# Altium PCB Card-Shuffler.PcbDoc
Units mil, origin at the board's own origin, x right, y up, seen from the top; angles counter-clockwise.
Board outline 4500 x 3050 mil, 4 copper layers (Top Layer, Power plane, Ground Plane, Bottom Layer), stack 23.756 mil thick; 55 components, 40 nets, 244 pads, 69 vias.
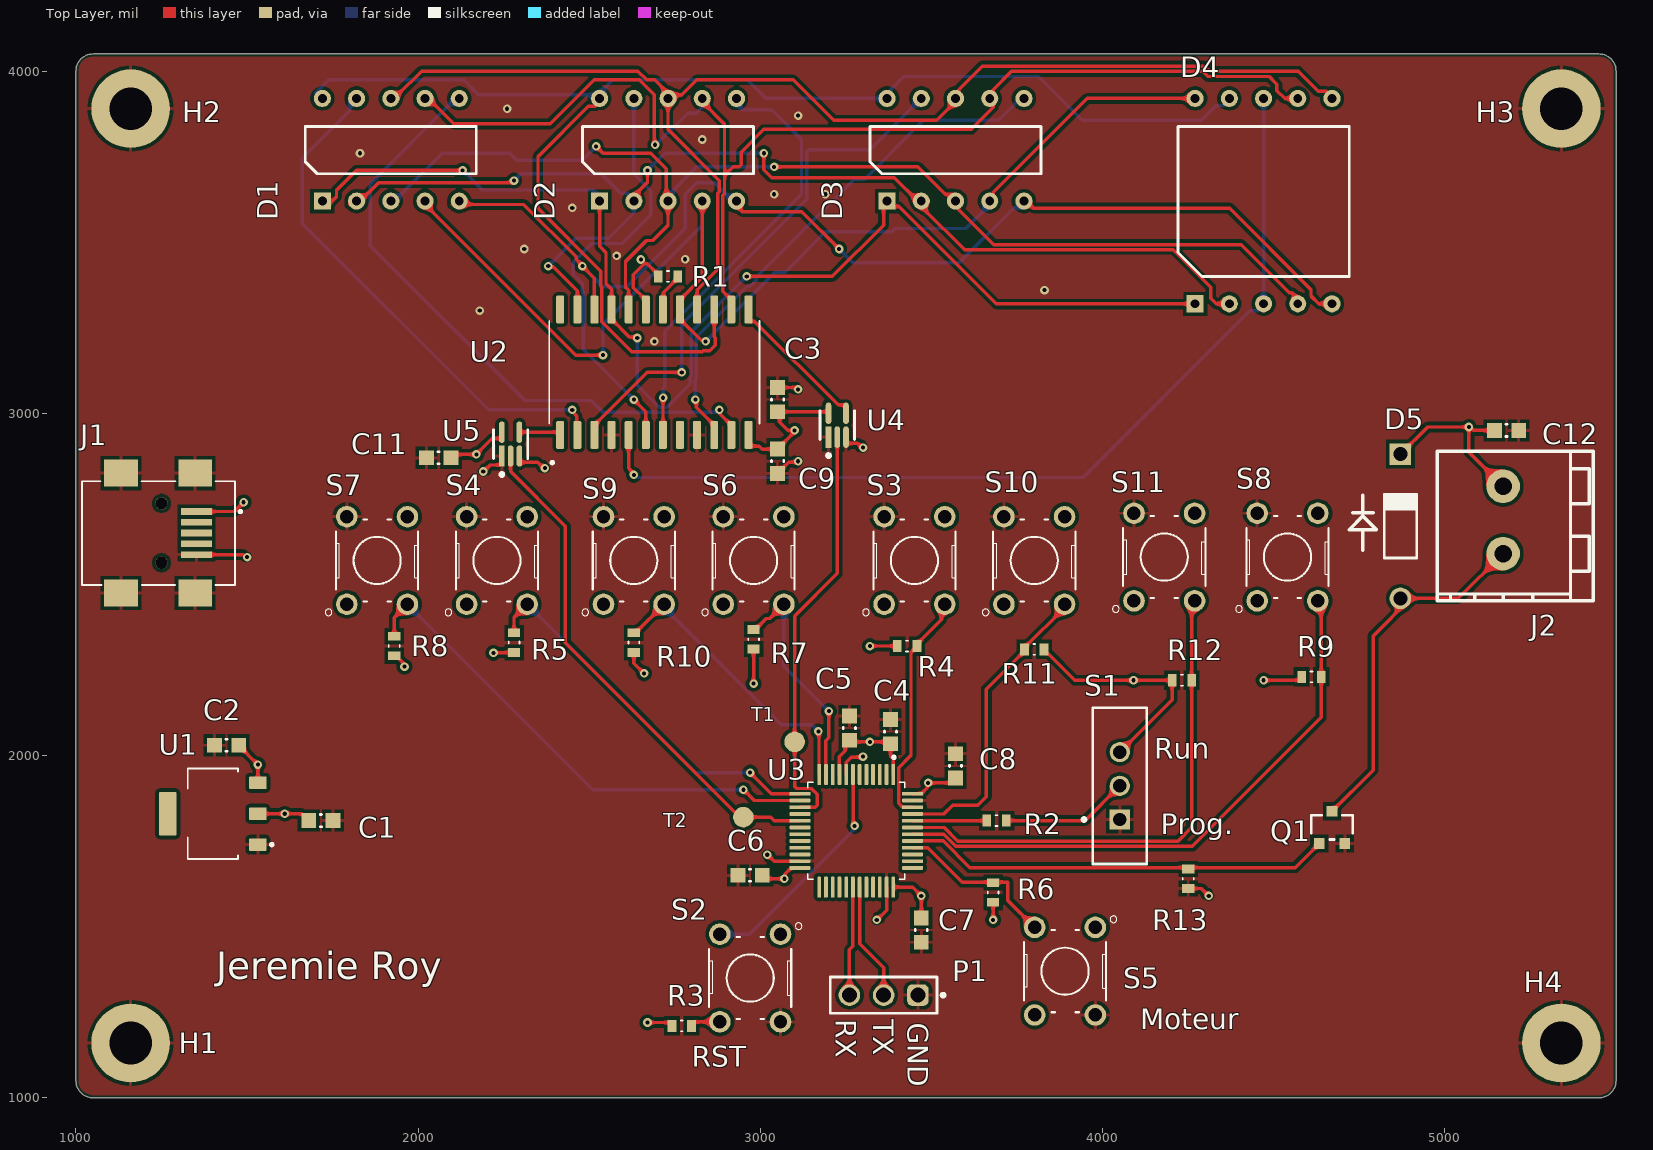
[diagram p0: Top Layer view]
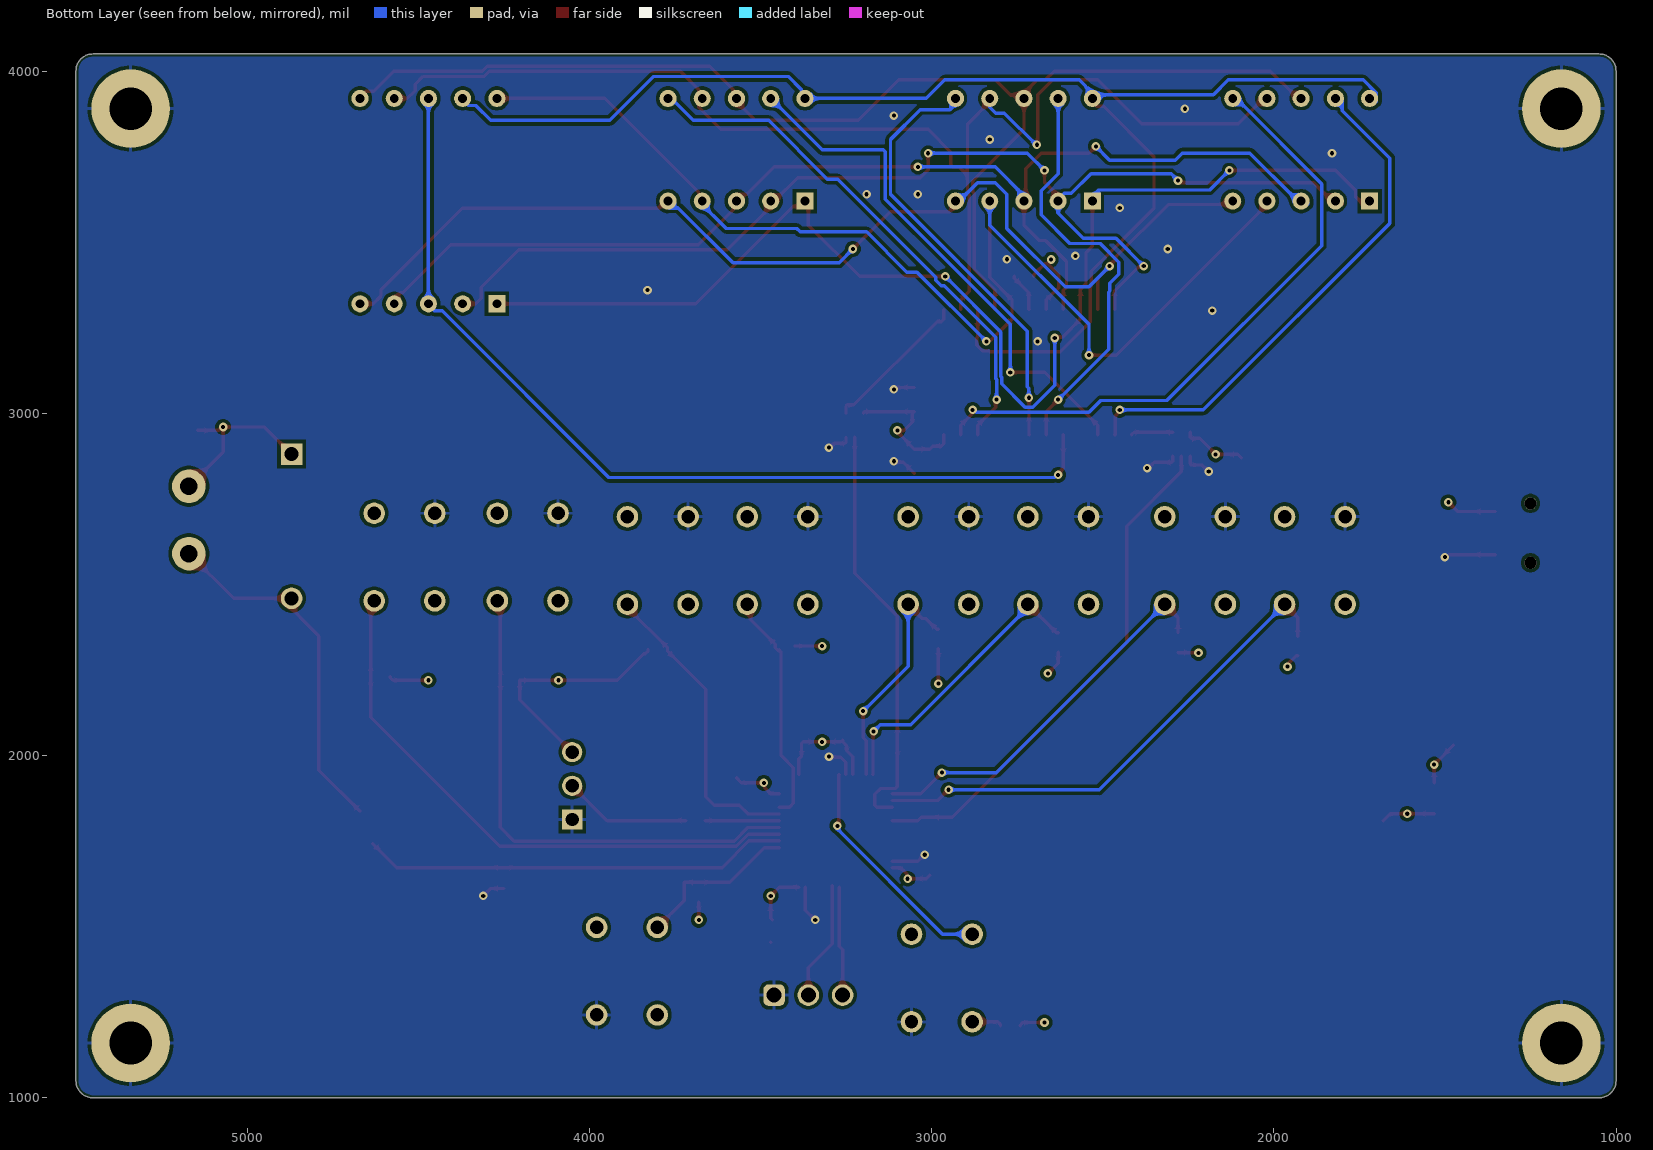
[diagram p1: Bottom Layer view, seen from below]
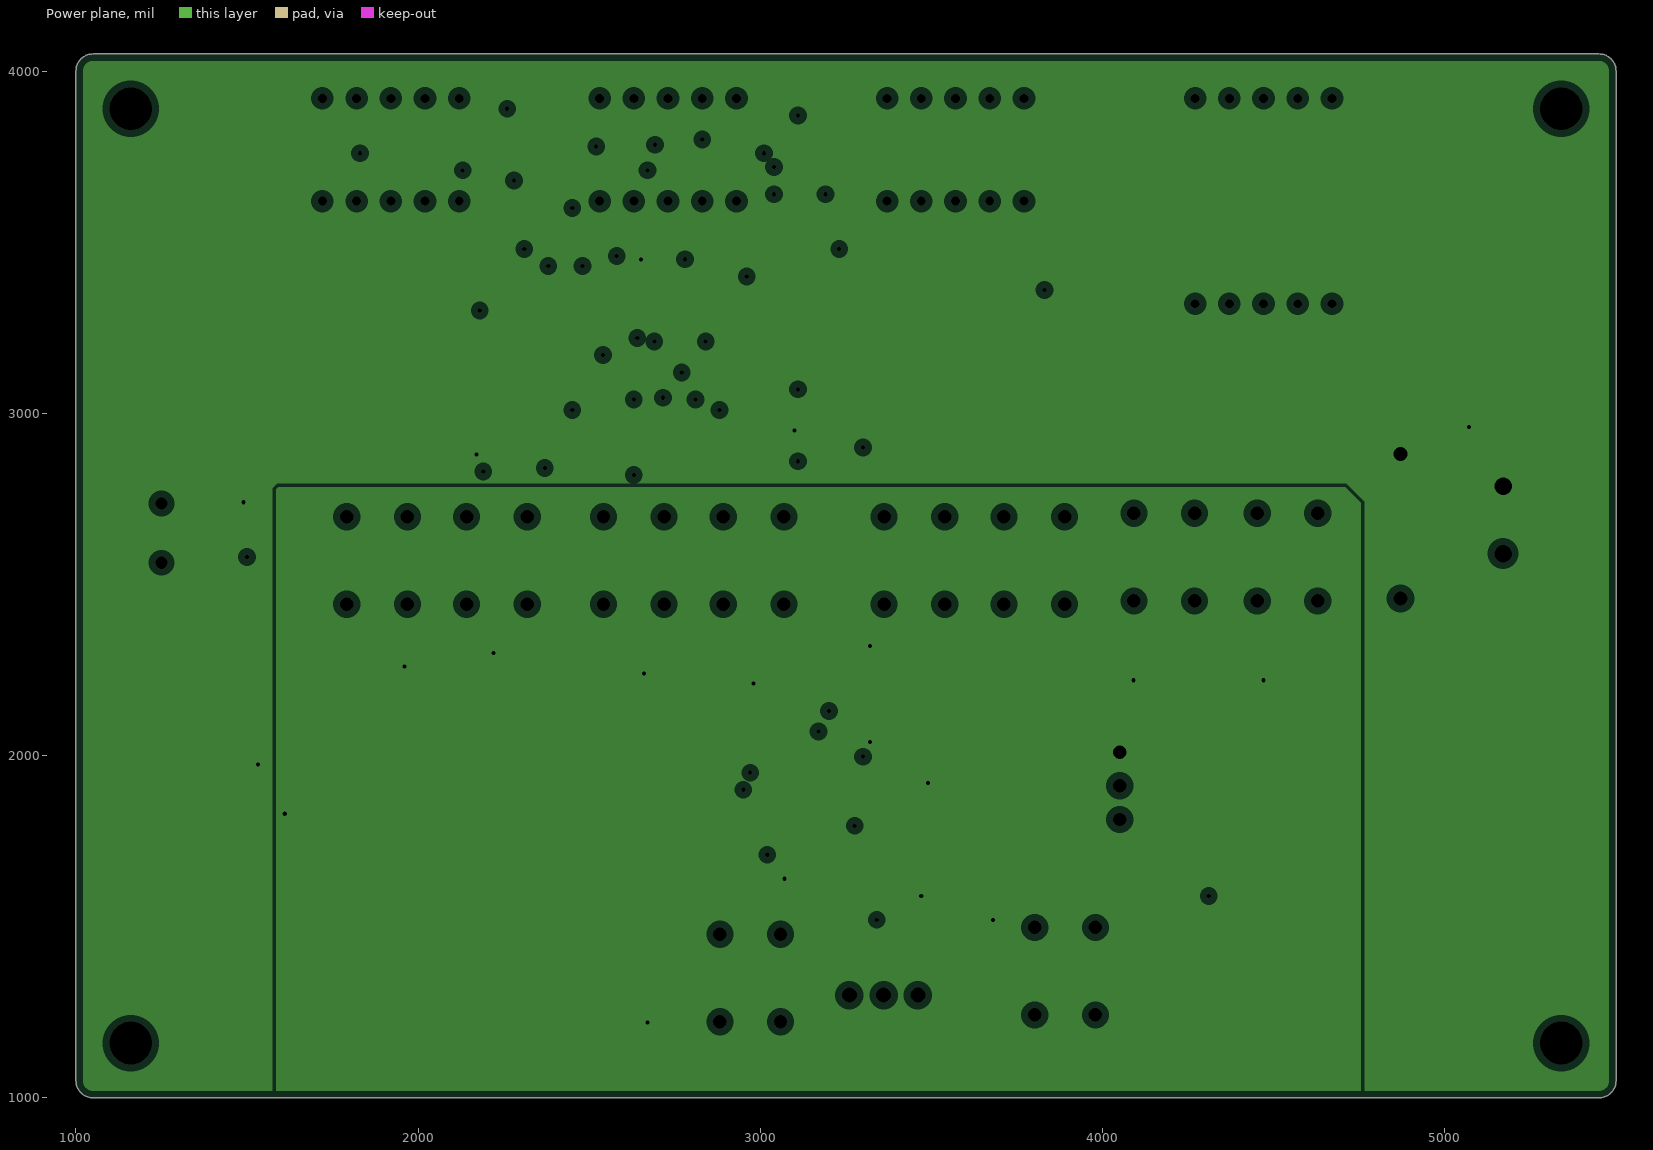
[diagram p2: Power plane, clearances drawn from the general rule]
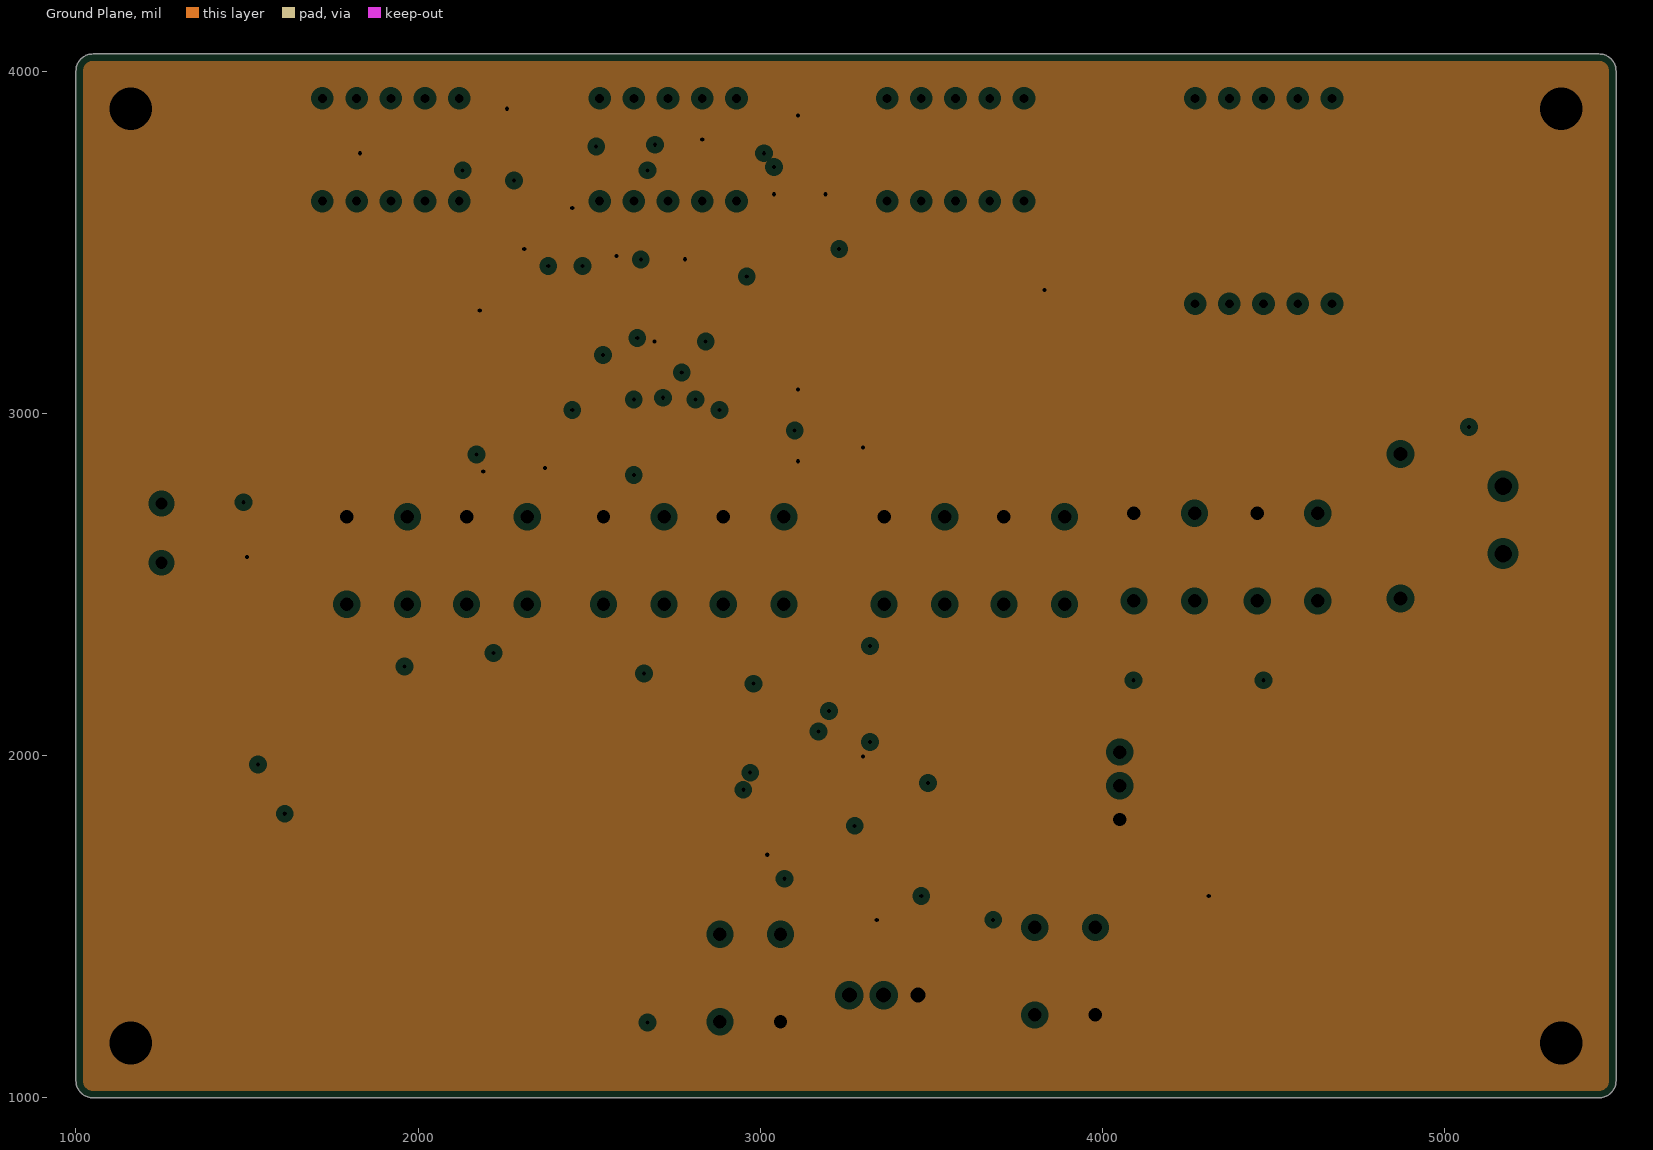
[diagram p3: Ground Plane, clearances drawn from the general rule]

## Layer stack, top to bottom
Top Solder: solder mask 0.4, Solder Resist, Dk 3.5
Top Layer: signal copper 1.4
Dielectric 2: prepreg 2.8, PP-006, Dk 4.1
Power plane: plane copper 1.378, net (Multiple Nets)
Dielectric 1: dielectric 12.6, FR-4, Dk 4.8
Ground Plane: plane copper 1.378, net GND
Dielectric 3: prepreg 2.8, PP-006, Dk 4.1
Bottom Layer: signal copper 1.4
Bottom Solder: solder mask 0.4, Solder Resist, Dk 3.5

## Board outline
1050,1000 cw(c1050,1050) 1000,1050 1000,4000 cw(c1050,4000) 1050,4050 5450,4050 cw(c5450,4000) 5500,4000 5500,1050 cw(c5450,1050) 5450,1000

## Design rules (kind name [scope] priority, off if disabled: settings)
BoardOutlineClearance [All] p1: gap=8 ignorepadtopadclearanceinfootprint=FALSE
Clearance [All] p1: gap=10 ignorepadtopadclearanceinfootprint=FALSE except(5: Arc-Arc Arc-Track Arc-SMDPad Track-Track Track-SMDPad SMDPad-SMDPad)
PlaneClearance [All] p1: clearance=20
PlaneConnect [All] p1: pad.planeconnectstyle=Relief pad.reliefexpansion=20 pad.reliefentries=4 pad.reliefconductorwidth=10 pad.reliefairgap=10 via.planeconnectstyle=Direct via.reliefexpansion=20 via.reliefentries=4 via.reliefconductorwidth=10 via.reliefairgap=10
PolygonConnect [All] p1: thpad.connectstyle=Relief thpad.reliefconductorwidth=10 thpad.reliefentries=4 thpad.polygonreliefangle="90 Angle" thpad.airgapwidth=10 smdpad.connectstyle=Relief smdpad.reliefconductorwidth=10 smdpad.reliefentries=4 smdpad.polygonreliefangle="90 Angle" smdpad.airgapwidth=10 via.connectstyle=Direct via.reliefconductorwidth=10 via.reliefentries=4 via.polygonreliefangle="90 Angle" via.airgapwidth=10
RoutingVias [All] p1: holewidth=12 width=25 viastyle="Through Hole" minholewidth=12 minwidth=25 maxholewidth=40 maxwidth=60
SolderMaskExpansion [All] p1: expansion=4 istentingtop=FALSE
SupplyNets "Schematic Supply Nets" [InNet('GND')] p1: voltage=0.000
Width [All] p1: maxlimit=15 minlimit=5 preferedwidth=10 minimp=50.000000 maximp=50.000000 favimp=50.000000
28 further rules are at their usual default settings.

## Components (designator, comment, footprint, x,y, rotation, side; value= is the part's Value field where it differs from the comment)
C1 "CAP 22uF 6.3V 0603(1608)" CAPC0603(1608)100_M 1715.43,1810 r180 top value=10uF
C2 "CAP 10uF 6.3V 0603(1608)" CAPC0603(1608)100_M 1440,2030 r0 top value=10uF
C3 "CAP 10uF 6.3V 0603(1608)" CAPC0603(1608)100_M 3050,3040 r270 top value=10uF
C4 "CAP 10uF 6.3V 0603(1608)" CAPC0603(1608)100_M 3380,2070 r270 top value=10uF
C5 "CAP 10uF 6.3V 0603(1608)" CAPC0603(1608)100_M 3260,2080 r270 top value=10uF
C6 "CAP 10uF 6.3V 0603(1608)" CAPC0603(1608)100_M 2970,1650 r0 top value=10uF
C7 "CAP 10uF 6.3V 0603(1608)" CAPC0603(1608)100_M 3470,1490 r90 top value=10uF
C8 "CAP 10uF 6.3V 0603(1608)" CAPC0603(1608)100_M 3570,1970 r270 top value=10uF
C9 "CAP 10uF 6.3V 0603(1608)" CAPC0603(1608)100_M 3050,2860 r270 top value=10uF
C11 "CAP 10uF 6.3V 0603(1608)" CAPC0603(1608)100_M 2060,2870 r0 top value=10uF
C12 "CAP 10uF 6.3V 0603(1608)" CAPC0603(1608)100_M 5180,2950 r180 top value=10uF
D1 "LTD-2701" LTD-701JD 1720,3620 r90 top
D2 "LTD-2701" LTD-701JD 2530,3620 r90 top
D3 "LTD-2701" LTD-701JD 3370,3620 r90 top
D4 "SC56-21GWA" SC56-21GWA 4270,3320 r90 top
D5 "IN4007" DIOAD1070W78L470D235P 4870,2670 r270 top
H1 "MTNHOLE" MTHOLE1_LAB4 1160,1160 r0 top
H2 "MTNHOLE" MTHOLE1_LAB4 1160,3890 r0 top
H3 "MTNHOLE" MTHOLE1_LAB4 5340,3890 r0 top
H4 "MTNHOLE" MTHOLE1_LAB4 5340,1160 r0 top
J1 "1734035-2" CONN_1734035-2 1250,2650 r270 top
J2 "1760510000" CONN_TERM_BLOCK_2POS_5mm_Model1 5170,2688.43 r270 top
P1 "61300311121" CONN_HDR_3POS_100MILS_TH 3360,1300 r180 top
Q1 "AO3400A" FP-SOT23-MFG 4670,1790 r90 top
R1 "10K" RES_ERJU03F1503V 2730,3400 r0 top
R2 "10k" RES_ERJU03F1503V 3690,1810 r180 top
R3 "10k" RES_ERJU03F1503V 2770,1210 r0 top
R4 "10k" RES_ERJU03F1503V 3428.54,2320 r180 top
R5 "10k" RES_ERJU03F1503V 2280,2330 r270 top
R6 "10k" RES_ERJU03F1503V 3680,1600 r270 top
R7 "10k" RES_ERJU03F1503V 2980,2340 r270 top
R8 "10k" RES_ERJU03F1503V 1930,2320 r270 top
R9 "10k" RES_ERJU03F1503V 4610,2230 r180 top
R10 "10k" RES_ERJU03F1503V 2630,2330 r270 top
R11 "10k" RES_ERJU03F1503V 3800,2310 r0 top
R12 "10k" RES_ERJU03F1503V 4231.46,2220 r180 top
R13 "10K" RES_ERJU03F1503V 4250,1640 r90 top
S1 "EG1218" ESWI-EG1218_V 4050,1911.57 r90 top
S2 "B3F-1000" SW_B3F-1000 2970,1350 r270 top
S3 "B3F-1000" SW_B3F-1000 3450,2570 r90 top
S4 "B3F-1000" SW_B3F-1000 2230,2570 r90 top
S5 "B3F-1000" SW_B3F-1000 3890,1370 r270 top
S6 "B3F-1000" SW_B3F-1000 2980,2570 r90 top
S7 "B3F-1000" SW_B3F-1000 1880,2570 r90 top
S8 "B3F-1000" SW_B3F-1000 4540,2580 r90 top
S9 "B3F-1000" SW_B3F-1000 2630,2570 r90 top
S10 "B3F-1000" SW_B3F-1000 3800,2570 r90 top
S11 "B3F-1000" SW_B3F-1000 4180,2580 r90 top
T1 "TestPoint" Testpoint 3100,2040 r0 top
T2 "TestPoint" Testpoint 2950,1820 r0 top
U1 "AMS1117-3.3" SOT229P700X180-4N 1400,1830 r90 top
U2 "MAX7219CWGT" SOIC127P1032X265-24N 2690,3120 r90 top
U3 "STM32F103CBT6" QFP50P900X900X160-48N 3280,1780 r270 top
U4 "74LVC1G125GW,125" FP-SOT353-1-IPC_A 3224.41,2965.22 r90 top
U5 "74LVC1G125GW,125" FP-SOT353-1-IPC_A 2270,2910 r90 top

## Footprints (in the part's own frame and the unit in brackets; to place one, negate y for a bottom-side part, rotate by r counter-clockwise, add the part's x,y. Pads: shape width x height; smd on the part's side, far side on the other; paste and mask are expansions set on the pad)
CAPC0603(1608)100_M [mm] "Chip Capacitor, Body 1.6x0.8mm, Height 1.0mm, IPC Low Density"
  rect 1.1x1.1 smd: 1(-0.9,0) 2(0.9,0)
  silkscreen extent -0.05,-0.45 0.05,0.45, body extent -0.87,-0.47 0.88,0.48, height 1
CONN_1734035-2 [mm]
  rect 0.5x2.3 smd paste+0 mask+0.102: 1(-1.6,2.6) 2(-0.8,2.6) 3(0,2.6) 4(0.8,2.6) 5(1.6,2.6)
  rect 2x2.5 smd paste+0 mask+0.102: S1(-4.45,2.5) S2(4.45,2.5) S3(-4.45,-3) S4(4.45,-3)
  round 0.9 hole 0.9 unplated mask+0: ""(-2.2,0) ""(2.2,0)
  silkscreen extent -3.85,-5.9 3.85,5.95, body extent -4.95,-5.84 4.95,3.36, height 4.2
CONN_HDR_3POS_100MILS_TH [mm] "Pin Header, pitch 2.54 mm, THT, Vertical, single row, 3p"
  rrect50% 1.6x1.6 hole 1.1: 1(-2.54,0)
  round 1.6 hole 1.1: 2(0,0) 3(2.54,0)
  silkscreen extent -4.53,-1.35 3.96,1.35, body extent -3.81,-1.27 3.81,1.27, height 8.57
CONN_TERM_BLOCK_2POS_5mm_Model1 [mm] "Terminal Block 2 positions Throught hole"
  round 2.5 hole 1.3: 1(-2.5,0) 2(2.5,0)
  silkscreen extent -5.1,-4.9 6,6.7, body extent -4.98,-4.7 5.59,4.8, height 15.1
DIOAD1070W78L470D235P [mm]
  round 1.6 hole 1.05: A(5.35,0)
  rect 1.6x1.6 hole 1.05: C(-5.35,0)
  silkscreen extent -2.4,-1.2 2.35,1.2, body extent -5.74,-1.35 5.74,1.35, height 2.7
ESWI-EG1218_V [mm] "THD, 3-Leads, Body 11.6x4mm, Pitch 2.5mm"
  rect 1.5x1.5 hole 1: 1(-2.5,0)
  round 1.5 hole 1: 2(0,0) 3(2.5,0)
  silkscreen extent -5.8,-2 5.8,2.77, body extent -5.8,-2 5.8,2, height 7.4
FP-SOT23-MFG [mm]
  rect 0.8x0.8 smd paste+0 mask+0: 1(-1.2,0.95) 2(-1.2,-0.95) 3(1.2,0)
  silkscreen extent -0.9,-1.55 0.9,1.55, body extent -1.7,-1.78 1.7,1.78, height 0.25
FP-SOT353-1-IPC_A [mm]
  rect 1.593x0.416 smd paste+0 mask+0: 1(-0.884,0.65)
  rrect100% 1.593x0.416 smd paste+0 mask+0: 2(-0.884,0) 3(-0.884,-0.65) 4(0.884,-0.65) 5(0.884,0.65)
  silkscreen extent -2.38,-1.27 1.06,1.27
LTD-701JD [mil]
  rect 50x50 hole 26: 1(0,0)
  round 50 hole 26: 2(0,-100) 3(0,-200) 4(0,-300) 5(0,-400) 6(300,-400) 7(300,-300) 8(300,-200) 9(300,-100) 10(300,0)
  silkscreen extent 80,-450 218,50
MTHOLE1_LAB4 [mil]
  round 230 / inner round 60 / far side round 230 hole 125: 1(0,0)
QFP50P900X900X160-48N [mm]
  rrect50% 1.56x0.28 smd mask+0.051: 1(-4.18,2.75) 2(-4.18,2.25) 3(-4.18,1.75) 4(-4.18,1.25) 5(-4.18,0.75) 6(-4.18,0.25) 7(-4.18,-0.25) 8(-4.18,-0.75) 9(-4.18,-1.25) 10(-4.18,-1.75) 11(-4.18,-2.25) 12(-4.18,-2.75) 25(4.18,-2.75) 26(4.18,-2.25) 27(4.18,-1.75) 28(4.18,-1.25) 29(4.18,-0.75) 30(4.18,-0.25) 31(4.18,0.25) 32(4.18,0.75) 33(4.18,1.25) 34(4.18,1.75) 35(4.18,2.25) 36(4.18,2.75)
  rrect50% 0.28x1.56 smd mask+0.051: 13(-2.75,-4.18) 14(-2.25,-4.18) 15(-1.75,-4.18) 16(-1.25,-4.18) 17(-0.75,-4.18) 18(-0.25,-4.18) 19(0.25,-4.18) 20(0.75,-4.18) 21(1.25,-4.18) 22(1.75,-4.18) 23(2.25,-4.18) 24(2.75,-4.18) 37(2.75,4.18) 38(2.25,4.18) 39(1.75,4.18) 40(1.25,4.18) 41(0.75,4.18) 42(0.25,4.18) 43(-0.25,4.18) 44(-0.75,4.18) 45(-1.25,4.18) 46(-1.75,4.18) 47(-2.25,4.18) 48(-2.75,4.18)
  silkscreen extent -5.56,-3.6 3.6,3.6, body extent -4.5,-4.5 4.5,4.5, height 1.6
RES_ERJU03F1503V [mm]
  rect 0.65x0.9 smd paste+0 mask+0.102: 1(-0.725,0) 2(0.725,0)
  silkscreen extent -0.08,-0.4 0.08,0.4, body extent -0.8,-0.4 0.8,0.4, height 0.45
SC56-21GWA [mil]
  rect 50x50 hole 26: 1(0,0)
  round 50 hole 26: 2(0,-100) 3(0,-200) 4(0,-300) 5(0,-400) 6(600,-400) 7(600,-300) 8(600,-200) 9(600,-100) 10(600,0)
  silkscreen extent 80,-450 518,50
SOIC127P1032X265-24N [mm]
  rrect25% 2.05x0.59 smd: 1(-4.655,6.985) 2(-4.655,5.715) 3(-4.655,4.445) 4(-4.655,3.175) 5(-4.655,1.905) 6(-4.655,0.635) 7(-4.655,-0.635) 8(-4.655,-1.905) 9(-4.655,-3.175) 10(-4.655,-4.445) 11(-4.655,-5.715) 12(-4.655,-6.985) 13(4.655,-6.985) 14(4.655,-5.715) 15(4.655,-4.445) 16(4.655,-3.175) 17(4.655,-1.905) 18(4.655,-0.635) 19(4.655,0.635) 20(4.655,1.905) 21(4.655,3.175) 22(4.655,4.445) 23(4.655,5.715) 24(4.655,6.985)
  silkscreen extent -6.8,-7.8 3.8,7.8, body extent -5.16,-7.7 5.16,7.7, height 2.65
SOT229P700X180-4N [mm]
  rrect15% 0.93x1.31 smd: 1(-2.29,-3.345) 2(0,-3.345) 3(2.29,-3.345)
  rrect15% 3.24x1.31 smd: 4(0,3.345)
  silkscreen extent -3.36,-4.47 3.36,1.86, body extent -3.15,-3.5 3.15,3.5, height 1.8
SW_B3F-1000 [mm]
  round 1.6 hole 1 mask+0.102: 1(-3.25,2.25) 2(3.25,2.25) 3(-3.25,-2.25) 4(3.25,-2.25)
  silkscreen extent -4.1,-3.05 3.05,3.85
Testpoint [mil]
  round 60 smd: 1(0,0)

## Part data
C1: library part CMP-1035-02796-1, "CAP 22uF 6.3V ±10% 0603 (1608 Metric) Thickness 1mm SMD", Case-EIA=0603, Case-Metric=1608, Rated Voltage="6.3 V", Tolerance=Â±10%, Max Thickness="1 mm", Technology=SMT
C2 C3 C4 C5 C6 C7 C8 C9 C11 C12: library part CMP-1035-02796-1, "CAP 10uF 6.3V ±10% 0603 (1608 Metric) Thickness 1mm SMD", Case-EIA=0603, Case-Metric=1608, Rated Voltage="6.3 V", Tolerance=Â±10%, Max Thickness="1 mm", Technology=SMT
D1 D2 D3: "Afficheur 7-segments double", Supplier Part Number 1=LTD-2701G, Supplier 1="Future Electronics"
D4: "Afficheur 7-Segment", Supplier Part Number 1=754-1704-5-ND, Supplier 1=DigiKey
D5: "Diode Standard 1000 V 1A Through Hole DO-204AL (DO-41)", Package="DO-41 Vishay Semiconductor", Check_prices=https://www.snapeda.com/parts/IN4007/Vishay/view-part/?ref=eda, MF="Vishay Semiconductor", MP=IN4007, SnapEDA_Link=https://www.snapeda.com/parts/IN4007/Vishay/view-part/?ref=snap
J1: "CONNECTOR, RECEPTACLE, MINI-USB, 1 PORT, SERIES B, RIGHT ANGLE", Package=None, Centerline_Pitch=".8 mm[.031 in]", Check_prices=https://www.snapeda.com/parts/1734035-2/TE+Connectivity+AMP+Connectors/view-part/?ref=eda, EU_RoHS_Compliance=Compliant, MF="TE Connectivity", MP=1734035-2, Number_of_Positions=5, Product_Type=Connector, SnapEDA_Link=https://www.snapeda.com/parts/1734035-2/TE+Connectivity+AMP+Connectors/view-part/?ref=snap, Supplier 1=Avnet, Supplier Part Number 1=1734035-2
J2: library part CONN_TERM_BLOCK_2POS_5mm_MODEL2, "CONN TERM BLOCK 2POS 5mm pitch", Manufacturer2=Weidmüller, Manufacturer 1="Phoenix Contact", Manufacturer Part Number 1=1890963, Supplier Part Number 1=281-1882-ND, CEGEP=CONWECO0003, Manufacturer2_PN=1760510000, Mounting Technology=TH, Supplier 1=Digi-Key
P1: library part CONN_HEADER_3POS, "Header 3pins single row, TH", Manufacturer 1="Würth Elektronik", Supplier Part Number 1=732-5316-ND, Manufacturer Part Number 1=61300311121, Mounting Technology=TH, Supplier 1=Digi-Key
Q1: library part CMP-83955-000006-1, "MOSFET N-CH 30V 5.7A SOT23", Case/Package=SOT-23, Continuous Drain Current (ID)=5.7A, Drain to Source Voltage (Vdss)=30V, Gate to Source Voltage (Vgs)=12V, Input Capacitance=630pF, Max Operating Temperature=150°C, Max Power Dissipation=1.4W, Min Operating Temperature=-55°C, Lead Free="Lead Free", Mount="Surface Mount", Number of Elements=1, Number of Pins=3, Packaging="Tape and Reel", Power Dissipation=1.4W, Radiation Hardening=No, Rds On Max=26.5mR
R1 R2 R3 R4 R5 R6 R7 R8 R9 R10 R11 R12 R13: library part ERJU03F1503V, "0201 anti-sulfurated resistor 0603 Anti-Sulfurated", Package="1608-2 Panasonic", Supplier Part Number 1=RC0603FR-1020KL, Check_prices=https://www.snapeda.com/parts/ERJ-U03F1503V/Panasonic/view-part/?ref=eda, MF=Panasonic, MP=ERJ-U03F1503V, SnapEDA_Link=https://www.snapeda.com/parts/ERJ-U03F1503V/Panasonic/view-part/?ref=snap, Supplier 1=Avnet
S1: library part CMP-1696-00002-1, "Slide Switch, 500 V, -20 to 70 degC, 3-Pin THD, RoHS", Case\Package=SOT-23-5, Dropout Voltage="300 mV", Max Input Voltage="8 V", Max Operating Temperature="85 degC", Max Ouput Current="150 mA", Max Power Dissipation="250 mW", Min Input Voltage="4.3 V", Min Operating Temperature="-40 degC", Nominal Output Voltage="3.3 V", Package Quantity=3000, ComponentLink1Description="Manufacturer URL", ComponentLink1URL=http://www.e-switch.ch/en/, ComponentLink2Description=Datasheet, ComponentLink2URL=https://www.e-switch.com/system/asset/product_line/data_sheet/119/EG.pdf, DatasheetVersion=Oct-15, Height="1.3 mm", Length="3 mm", Mount="Surface Mount", Output Current="150 mA", Output Voltage="3.3 V", Outputs=1, PackageDescription="3-Pin Through Hole Device, Body 11.6 x 4 mm, Pitch 2.5 mm", PackageReference=EG1218, Packaging="Tape and Reel", Pins=5, Power Rating="250 mW", Radiation Hardening=No, REACH SVHC="No SVHC", RoHSCompliant=true, Width="1.8 mm"
S2 S3 S4 S5 S6 S7 S8 S9 S10 S11: "Switch Tactile N.O. SPST Flat Round Button PC Pins 0.05A 24VDC 1000000Cycles 0.98N Thru-Hole Bag", Package=None, Supplier Part Number 1=B3F1000, Check_prices=https://www.snapeda.com/parts/B3F1000/Omron/view-part/?ref=eda, MF=Omron, MP=B3F1000, SnapEDA_Link=https://www.snapeda.com/parts/B3F1000/Omron/view-part/?ref=snap, Supplier 1=Avnet
U1: "Linear Voltage Regulator IC Positive Fixed 1 Output 1A SOT-223-3L", Package="SOT-223-3L UMW", Supplier Part Number 1=5272-AMS1117-3.3SCT-ND, Check_prices=https://www.snapeda.com/parts/AMS1117-3.3/UMW/view-part/?ref=eda, MF=UMW, MP=AMS1117-3.3, SnapEDA_Link=https://www.snapeda.com/parts/AMS1117-3.3/UMW/view-part/?ref=snap, Supplier 1=DigiKey
U2: "IC DRVR 7 SEGMNT 8 DIGIT 24SOIC", Package="SOIC-24 Maxim", Supplier Part Number 1=MAX7219CWG+TCT-ND, Check_prices=https://www.snapeda.com/parts/MAX7219CWG+/Analog+Devices/view-part/?ref=eda, MF="Analog Devices", MP=MAX7219CWG+, SnapEDA_Link=https://www.snapeda.com/parts/MAX7219CWG+/Analog+Devices/view-part/?ref=snap, Supplier 1=DigiKey
U3: "ARMÂ® CortexÂ®-M3 STM32F1 Microcontroller IC 32-Bit Single-Core 72MHz 128KB (128K x 8) FLASH", Package="LQFP-48 STMicroelectronics", Check_prices=https://www.snapeda.com/parts/STM32F103CBT6/STMicroelectronics/view-part/?ref=eda, MF=STMicroelectronics, MP=STM32F103CBT6, SnapEDA_Link=https://www.snapeda.com/parts/STM32F103CBT6/STMicroelectronics/view-part/?ref=snap, Supplier 1="Arrow Electronics", Supplier Part Number 1=STM32F103CBT6
U4 U5: library part CMP-14347-000004-1, "IC BUF NON-INVERT 5.5V 5TSSOP"

## Via types
v1: diameter 25, hole 12, Top Layer to Bottom Layer, 69 vias

## Nets (pads, with @x,y where several pads share a name; then routed paths per layer and width w, separated by ;. In a path a pad name is that pad's centre, name@x,y a point inside that pad or via, vN(x,y) a via of type N, cw(c..) or ccw(c..) an arc to the next point about the centre after c; other vN are vias at no path point)
3.3V: C1.2 C4.2 C5.2 C6.2 C7.2 C8.2 R3.1 R4.2 R5.2 R6.2 R7.2 R8.2 R9.2 R10.2 R11.2 R12.2 S1.3 U1.2 U3.1 U3.9 U3.24 U3.36 U3.48 | length 2227.1
  Top Layer w10: U1.2 v1(1610,1830) 1660,1830 C1.2 ; R8.2 1934.92,2291.46 1957.13,2269.25 1957.13,2262.87 v1(1960,2260) ; v1(2220,2300) 2220.73,2300.73 2279.27,2300.73 R5.2 ; R10.2 2630,2270 v1(2660,2240) ; v1(2670,1220) 2733.66,1220 2741.46,1212.2 R3.1 ; v1(2980,2210) R7.2 ; C6.2 3015.43,1640 v1(3070,1640) 3072.87,1642.87 3072.87,1654.37 3090.24,1671.73 U3.24 ; U3.9 3230.79,1996.79 3247.77,2013.77 3247.77,2027.91 3259.86,2040 C5.2@3260,2040 ; C5.2 3264.57,2040 v1(3320,2040) 3374.57,2040 C4.2 3380,1997.91 3387.76,1990.16 3387.76,1945.08 U3.1 ; v1(3320,2320) R4.2 ; U3.36 3444.57,1615.43 v1(3470,1590) 3470,1524.57 C7.2@3465.43,1520 ; U3.48 3469.76,1888.27 3487.13,1905.63 3487.13,1917.13 v1(3490,1920) 3555.43,1920 C8.2 ; v1(3680,1520) R6.2 ; R11.2 3828.54,2305.08 3836.34,2297.28 3841.26,2297.28 3918.54,2220 v1(4090,2220) R12.2 4202.91,2162.91 S1.3 ; v1(4470,2220) 4573.66,2220 4581.46,2227.8 R9.2
5V: C2.2 C3.2 C9.1 C11.2 C12.2 D5.C J1.1 J2.1 R1.1 U1.3 U2.12 U2.19 U4.5 U5.5 | length 1668
  Top Layer w10: J1.1 1462.99,2712.99 v1(1490,2740) ; C2.2 v1(1531.69,1973.74) U1.3 ; C11.2 2105.43,2880 v1(2170,2880) 2216.62,2926.62 2241.47,2926.62 2244.41,2929.56 U5.5 ; v1(2650.55,3449.45) 2660,3440 ; U2.19 2665,3332.01 2658.39,3338.62 2657.2,3338.62 2628.54,3367.28 2628.54,3404.92 2660,3436.38 2660,3440 ; R1.1 2701.46,3404.92 2669.25,3437.13 2662.87,3437.13 2660,3440 ; U2.12 2965,2910.9 2971.61,2904.28 2996.6,2904.28 3005.45,2895.43 C9.1 3097.13,2942.56 3097.13,2947.13 v1(3100,2950) 3080,2950 3056.23,2973.77 3056.23,2998.34 C3.2 3195.88,3004.57 3198.82,3001.62 U4.5 ; D5.C 4949.37,2960 v1(5070,2960) ; C12.2 5084.06,2950 5074.06,2960 v1(5070,2960) ; J2.1 5070,2886.85 v1(5070,2960)
DIG0: D1.9 U2.2 | length 1506.5
  Top Layer w10: v1(2450,3010) 2450,3005.94 2463.85,2992.09 2463.85,2937.88 U2.2
  Bottom Layer w10: D1.9@1800,3910 1800,3884.41 1661.38,3745.79 1661.38,3554.57 2205.95,3010 v1(2450,3010)
DIG1: D1.6 U2.11 | length 1831.8
  Top Layer w10: v1(2880,3010) 2882.87,3007.13 2882.87,2997.6 2915,2965.47 U2.11
  Bottom Layer w10: D1.6@2100,3910 1860,3670 1860,3490 2312.5,3037.5 2505.61,3037.5 2540.05,3003.05 2869,3003.05 2875.94,3010 v1(2880,3010)
DIG2: D2.9 U2.6 | length 1228.4
  Top Layer w10: v1(2630,3040) 2665,3005 U2.6
  Bottom Layer w10: v1(2630,3040) 2482.5,3187.5 2482.5,3353.78 2478.84,3357.45 2478.84,3380.23 2452.5,3406.56 2452.5,3441.39 2507.23,3496.12 2596.33,3496.12 2680,3579.79 2680,3650 2630,3700 D2.9@2630,3910
DIG3: D2.6 U2.7 | length 1269.8
  Top Layer w10: U2.7 2715.28,2937.01 2715.28,3045.28 v1(2715.55,3045.55)
  Bottom Layer w10: v1(2715.55,3045.55) 2715.55,3073.61 2720,3078.05 2720,3240 3120,3640 3120,3800 3032.76,3887.24 2947.2,3887.24 2930,3904.44 D2.6@2930,3910
DIG4: D3.9 U2.3 | length 1543
  Top Layer w10: U2.3 2515,2965.47 2668.97,3119.45 v1(2770,3119.45)
  Bottom Layer w10: v1(2770,3119.45) 2770,3260 3135,3625 3135,3764.14 3140.86,3770 3320,3770 D3.9
DIG5: D3.6 U2.10 | length 1571.2
  Top Layer w10: v1(2810,3040) 2812.87,3037.13 2812.87,3017.6 2865,2965.47 U2.10
  Bottom Layer w10: v1(2810,3040) 2810,3098.79 2812.5,3101.29 2812.5,3222.5 2962.5,3372.5 2971.39,3372.5 2987.5,3388.61 2987.5,3397.5 3274.21,3684.21 3304.21,3684.21 3475.79,3855.79 3696,3855.79 3747.24,3907.03 3767.03,3907.03 D3.6@3780,3920
DIG6: D4.3 D4.8 U2.5 | length 2778.2
  Top Layer w10: U2.5 2615,2839.06 2630,2824.06 v1(2630,2820)
  Bottom Layer w10: v1(2630,2820) 2634.06,2820 2641.56,2812.5 3942.71,2812.5 4429.62,3299.41 4452.8,3299.41 4470,3316.61 D4.3 D4.8
GND: C1.1 C2.1 C3.1 C4.1 C5.1 C6.1 C7.1 C8.1 C9.2 C11.1 C12.1 H1.1 H2.1 H3.1 H4.1 J1.5 J1.S1 J1.S2 J1.S3 J1.S4 P1.1 Q1.2 R13.1 S1.1 S2.2 S3.2 S4.2 S5.2 S6.2 S7.2 S8.2 S9.2 S10.2 S11.2 U1.1 U2.4 U2.9 U3.8 U3.23 U3.35 U3.47 U4.1 U4.3 U5.1 U5.3 | length 914.8
  Top Layer w10: J1.5 1488.93,2587.01 1495.94,2580 v1(1500,2580) ; v1(2190,2830) 2191.17,2830 2210.03,2848.86 2241.22,2848.86 2244.41,2852.05 U5.1 ; U5.3 2295.59,2859.99 2298.53,2857.05 2348.89,2857.05 2365.94,2840 v1(2370,2840) ; v1(3020,1710) 3021.73,1710 3040.31,1691.42 U3.23 ; C9.2 3082.56,2857.13 3107.13,2857.13 v1(3110,2860) ; C3.1 3100.51,3075.43 3105.94,3070 v1(3110,3070) ; U4.3 3250,2915.21 3252.94,2912.26 3283.68,2912.26 3295.94,2900 v1(3300,2900) ; U3.8 3250.47,1980.47 3265.34,1995.34 3298.27,1995.34 v1(3299.68,1996.76) ; v1(3340,1520) 3368.58,1548.58 U3.35 ; R13.1 4288.54,1611.46 v1(4310,1590)
  other v1: 2690,3210 2180,3300 3830,3360 2780,3450 2580,3460 2310,3480 2450,3600 3040,3640 3190,3640 1830,3760 2830,3800 3110,3870 2260,3890
Moteur: Q1.1 R13.2 U3.41 | length 1249.6
  Top Layer w10: U3.41 3533.9,1750.47 3612.05,1672.32 4562.17,1672.32 Q1.1
NetD5_A: D5.A J2.2 Q1.3 | length 1041.5
  Top Layer w10: Q1.3 4790,1957.24 4790,2349.37 4900,2459.37 5039.37,2459.37 J2.2
NetR1_2: R1.2 U2.18 | length 114.8
  Top Layer w10: U2.18 2716.23,3304.5 2716.23,3352.76 2758.54,3395.08 R1.2
NetR2_1: R2.1 S1.2 | length 373.5
  Top Layer w10: R2.1 3948.43,1810 S1.2
NetR2_2: R2.2 U3.44 | length 217.1
  Top Layer w10: U3.44 3660.98,1809.53 R2.2
NetR3_2: R3.2 S2.4 | length 90.4
  Top Layer w10: R3.2 2798.54,1214.25 2806.34,1222.05 S2.4
NetS2_3: S2.3 U3.7 | length 686.5
  Top Layer w10: U3.7 3270.67,1944.06 3270.67,1799.33 v1@3280,1790
  Bottom Layer w10: S2.3 2967.95,1477.95 v1@3280,1790
  other v1: 3275.33,1794.67
NetU2_1: U2.1 U5.4 | length 123.6
  Top Layer w10: U5.4 2408.39,2944.78 2415,2938.17 U2.1
NetU2_13: U2.13 U4.4 | length 440
  Top Layer w10: U2.13 2965,3274.53 2971.61,3267.91 2983.53,3267.91 3227.06,3024.39 3247.06,3024.39 3250,3021.44 U4.4
PA1: R7.1 S6.3 U3.11 | length 674.5
  Top Layer w10: R7.1 2984.92,2368.54 3016.92,2400.54 3027.07,2400.54 S6.3 ; U3.11 3191.42,2043.82 3200,2052.4 v1(3200,2130)
  Bottom Layer w10: S6.3 3068.58,2261.42 v1(3200,2130)
PA2: R10.1 S9.3 U3.12 | length 860.4
  Top Layer w10: R10.1 2634.92,2358.54 2718.43,2442.05 S9.3 ; v1(3169.45,2070.55) 3171.22,2068.78 3171.22,1945.08 U3.12
  Bottom Layer w10: S9.3 2718.58,2432.53 3061.11,2090 3150,2090 v1(3169.45,2070.55)
PA3: R5.1 S4.3 U3.13 | length 1125.7
  Top Layer w10: R5.1 2280,2403.46 S4.3 ; v1(2970,1950) 3031.73,1888.27 U3.13
  Bottom Layer w10: S4.3 2810.63,1950 v1(2970,1950)
PA4: R8.1 S7.3 U3.14 | length 1493.9
  Top Layer w10: R8.1 1930,2403.46 S7.3 ; v1(2950,1900) 2950.8,1900 2982.22,1868.58 U3.14
  Bottom Layer w10: S7.3 2510.63,1900 v1(2950,1900)
PB4: R6.1 S5.3 U3.40 | length 484.7
  Top Layer w10: U3.40 3489.21,1730.79 3590,1630 3722.91,1630 3722.91,1576.46 S5.3
PB6: R9.1 S8.3 U3.42 | length 1704.3
  Top Layer w10: U3.42 3535.43,1770.16 3570.59,1735 4262.09,1735 4638.54,2111.46 R9.1 ; S8.3 4638.54,2442.09 R9.1@4638.54,2234.92
PB7: R12.1 S11.3 U3.43 | length 1514.1
  Top Layer w10: U3.43 3536.96,1789.84 3576.8,1750 4220,1750 4260,1790 R12.1 4260,2443.46 S11.3
PB8: R11.1 S10.3 U3.45 | length 893.2
  Top Layer w10: U3.45 3536.02,1829.21 3561.66,1854.86 3634.86,1854.86 3660,1880 3660,2193.62 3771.46,2305.08 R11.1 3771.46,2314.92 3888.58,2432.05 S10.3
PB9: R4.1 S3.3 U3.46 | length 684.9
  Top Layer w10: U3.46 3444.06,1849.41 3414.99,1849.41 3403.86,1860.54 3403.86,1964.14 3440,2000.28 3440,2301.43 3445.86,2307.28 3449.29,2307.28 3457.09,2315.08 3457.09,2324.92 3528.44,2396.28 3528.44,2431.91 S3.3
Segment_A: D1.7 D2.7 D3.7 D4.7 U2.14 | length 3660.3
  Top Layer w10: D1.7 2030,3920 2104.21,3845.79 2385.58,3845.79 2514,3974.21 2646,3974.21 2690,3930.21 2690,3786.89 v1(2692.3,3784.6) ; D2.7@2830,3910 2895,3845 2895,3695 ; U2.14 2915,3332.01 2890,3357.01 2890,3636.57 2895,3641.57 2895,3695 ; D4.7 4531.38,3920 4508.69,3942.69 4508.69,3961.52 4486,3984.21 4307.21,3984.21 4292.21,3999.21 3733.62,3999.21 3680,3945.59 3680,3920 3680,3894.41 3615.59,3830 3010,3830 2943.39,3763.39 2943.39,3725.86 2937.53,3720 2920,3720 2895,3695
  Bottom Layer w10: v1(2692.3,3784.6) 2694.6,3784.6 2787.32,3877.32 2812.8,3877.32 2830,3894.52 D2.7@2830,3910
Segment_B: D1.8 D2.8 D3.8 D4.6 U2.16 | length 3725.5
  Top Layer w10: D1.8@1917.2,3930.59 1940.38,3930.59 2009.79,4000 2641.42,4000 2667.21,3974.21 2691.38,3974.21 2730,3935.59 D2.8@2730,3913.39 ; U2.16 2815,3360.79 2875,3420.79 2875,3642.78 2880,3647.78 2880,3680 2730,3830 2730,3910 D2.8@2730,3913.39 ; D4.6 4670,3923.39 4652.8,3940.59 4629.62,3940.59 4571,3999.21 4313.42,3999.21 4298.42,4014.21 3648.62,4014.21 3580,3945.59 3580,3920 3515.79,3855.79 3214.21,3855.79 3095.79,3974.21 2814,3974.21 2770.38,3930.59 2747.2,3930.59 D2.8@2730,3913.39
Segment_C: D1.3 D2.3 D3.3 D4.4 U2.20 | length 3513.4
  Top Layer w10: v1(2520,3780) 2540,3760 2680,3760 2724.89,3715.11 2724.89,3615.11 2730,3610 2730,3548.89 2685.97,3504.86 2667.08,3504.86 2605.75,3443.53 2605.75,3368.87 2615,3359.61 U2.20 ; v1(3040,3720) 3460.21,3720 3539.62,3640.59 3562.8,3640.59 3580,3623.39 3580,3620 3580,3594.41 3681.55,3492.86 4404.93,3492.86 4545.08,3352.72 4552.8,3352.72 4570,3335.51 D4.4
  Bottom Layer w10: D1.3@1900,3610 1900,3613.39 1917.2,3630.59 1940.38,3630.59 2069.79,3760 2267.87,3760 2287.87,3740 2480,3740 v1(2520,3780) ; D2.3@2730,3610 2730,3635.59 2814.41,3720 v1(3040,3720)
Segment_D: D1.2 D2.2 D3.2 D4.2 U2.23 | length 3501.5
  Top Layer w10: D1.2@1800,3610 1800,3613.39 1817.2,3630.59 1840.38,3630.59 1884,3674.21 2270.15,3674.21 2275.94,3680 v1(2280,3680) ; v1(2380,3430) 2382.87,3427.13 2396.49,3427.13 2465,3358.62 U2.23 ; D2.2@2630,3610 2630,3635.59 2670,3675.59 v1(2670,3710) ; v1(3010,3760) 3010,3711.11 3032.58,3688.53 3391.47,3688.53 3456.03,3623.97 3466.03,3623.97 3477.65,3612.35 3477.65,3596.76 3596.55,3477.86 4206.19,3477.86 4315.61,3368.44 4315.61,3335.77 4331.38,3320 D4.2
  Bottom Layer w10: v1(2280,3680) 2300,3700 2534.05,3700 2591.38,3642.67 2612.8,3642.67 2630,3625.47 2630,3610 2630,3584.41 2556.71,3511.12 2461.12,3511.12 v1(2380,3430) ; v1(2670,3710) 2720,3760 v1(3010,3760)
Segment_DP: D1.5 D2.5 D3.5 D4.5 U2.22 | length 3313.4
  Top Layer w10: D1.5@2100,3610 2308.89,3610 2461.46,3457.43 2461.46,3450.36 2480,3431.82 v1(2480,3430) 2515,3395 U2.22 ; D2.5@2930,3610 2930,3606.61 2947.2,3589.41 3120.59,3589.41 v1(3230,3480) ; D3.5@3780,3620 3780,3616.61 3797.2,3599.41 4370.8,3599.41 4608.69,3361.52 4608.69,3342.69 4631.38,3320 D4.5
  Bottom Layer w10: v1(2480,3430) 2540,3370 2610,3370 2780,3540 2780,3640.21 2814,3674.21 2865.79,3674.21 D2.5@2930,3610 ; v1(3230,3480) 3270,3440 3580.21,3440 3739.62,3599.41 3762.8,3599.41 3780,3616.61 D3.5@3780,3620
Segment_E: D1.1 D2.1 D3.1 D4.1 U2.21 | length 3689.9
  Top Layer w10: D1.1@1700,3610 1738.62,3610 1761.31,3632.69 1761.31,3651.52 1819.79,3710 v1(2130,3710) ; D2.1@2530,3610 2530,3487.95 2548.66,3469.28 2548.66,3378.14 2565,3361.8 U2.21 2565,3274.53 2616.66,3222.87 2637.13,3222.87 v1(2640,3220) ; v1(2960,3400) 3210,3400 3360,3550 3360,3600 3370,3610 3380,3610 D3.1 3385.25,3604.75 3404.14,3604.75 3688.89,3320 D4.1
  Bottom Layer w10: v1(2130,3710) 2187.5,3652.5 2511.38,3652.5 2530,3633.88 D2.1@2530,3610 ; v1(2640,3220) 2640,3082.22 2704.16,3018.05 2726.95,3018.05 2795,3086.11 2795,3105 2797.5,3107.5 2797.5,3237.5 v1(2960,3400)
Segment_F: D1.10 D2.10 D3.10 D4.9 U2.15 | length 4214.3
  Top Layer w10: D2.10@2530,3910 2517.24,3897.24 2497.24,3897.24 2350,3750 2350,3598.89 2533.66,3415.23 2533.66,3371.93 2536.61,3368.98 2536.61,3267.24 2623.86,3180 2830,3180 2832.5,3182.5 2851.39,3182.5 2867.5,3198.61 2867.5,3221.39 2865,3223.89 U2.15
  Bottom Layer w10: D1.10@1700,3910 1700,3935.59 1738.62,3974.21 2132.65,3974.21 2176.27,3930.59 2512.8,3930.59 2530,3913.39 2530,3910 2530,3935.59 2568.62,3974.21 2961.29,3974.21 3015.51,3920 3380,3920 3380,3945.59 3418.62,3984.21 3811.61,3984.21 3940.04,3855.79 4287.65,3855.79 4331.27,3899.41 4352.8,3899.41 4370,3916.61 D4.9
Segment_G: D1.4 D2.4 D3.4 D4.10 U2.17 | length 3472.7
  Top Layer w10: D1.4@2014.89,3614.89 2459.79,3170 v1(2540,3170) ; D2.4@2830,3610 2830,3397.01 2765,3332.01 U2.17 2765,3274.53 2826.66,3212.87 2837.13,3212.87 v1(2840,3210) ; D3.4@3680,3620 3680,3645.59 3954.41,3920 D4.10
  Bottom Layer w10: v1(2540,3170) 2540,3260 2830,3550 D2.4@2830,3610 ; v1(2840,3210) 3042.5,3412.5 3072.5,3412.5 3190,3530 3384.05,3530 3394.05,3540 3600,3540 D3.4@3680,3620
SPI1_CLK: T1.1 U3.15 U4.2 | length 1232.6
  Top Layer w10: U3.15 3160.14,1848.9 3166,1854.76 3166,1886.45 3148.67,1903.78 3105.86,1903.78 3100,1909.64 3100,1990 T1.1 3100,2407.71 3224.41,2532.12 U4.2
SPI1_MOSI: T2.1 U3.17 U5.2 | length 1512.5
  Top Layer w10: U5.2 2270,2830 2430,2670 2430,2330 2940,1820 T2.1 3030,1820 3040.47,1809.53 U3.17
UARTMCURX: P1.2 U3.31 | length 348.9
  Top Layer w10: U3.31@3290.16,1620 3290.16,1449.84 3360,1380 P1.2
UARTMCUTX: P1.3 U3.30 | length 319.6
  Top Layer w10: P1.3 3260,1432.28 3270.16,1442.44 U3.30
pads on no net: J1. J1.2 J1.3 J1.4 S2.1 S3.1 S3.4 S4.1 S4.4 S5.1 S5.4 S6.1 S6.4 S7.1 S7.4 S8.1 S8.4 S9.1 S9.4 S10.1 S10.4 S11.1 S11.4 U1.4 U2.8 U2.24 U3.2 U3.3 U3.4 U3.5 U3.6 U3.10 U3.16 U3.18 U3.19 U3.20 U3.21 U3.22 U3.25 U3.26 U3.27 U3.28 U3.29 U3.32 U3.33 U3.34 U3.37 U3.38 U3.39

## Polygon pours and split planes (outlines as drawn)
GND on Bottom Layer "GND_L04_P002" (solid, remove dead copper, pour order 2): 1000,4050 5500,4050 5500,1000 1000,1000
GND on Top Layer "GND_L01_P001" (solid, remove dead copper, pour order 1): 1000,4050 5500,4050 5500,1000 1000,1000
GND on Ground Plane (split plane): 5454.69,4029.62 5459.27,4028.52 5463.62,4026.72 5467.63,4024.26 5471.21,4021.21 5474.26,4017.63 5476.72,4013.62 5478.52,4009.27 5479.62,4004.69 5479.95,4000.5 5479.9,4000 5479.9,1050 5479.95,1049.5 5479.62,1045.31 5478.52,1040.73 5476.72,1036.38 5474.26,1032.37 5471.21,1028.79 5467.63,1025.74 5463.62,1023.28 5459.27,1021.48 5454.69,1020.38 5450.5,1020.05 5450,1020.1 1050,1020.1 1049.5,1020.05 1045.31,1020.38 1040.73,1021.48 1036.38,1023.28 1032.37,1025.74 1028.79,1028.79 1025.74,1032.37 1023.28,1036.38 1021.48,1040.73 1020.38,1045.31 1020.05,1049.5 1020.1,1050 1020.1,4000 1020.05,4000.5 1020.38,4004.69 1021.48,4009.27 1023.28,4013.62 1025.74,4017.63 1028.79,4021.21 1032.37,4024.26 1036.38,4026.72 1040.73,4028.52 1045.31,4029.62 1049.5,4029.95 1050,4029.9 5450,4029.9 5450.5,4029.95
5V on Power plane (split plane): 5454.69,4029.62 5459.27,4028.52 5463.62,4026.72 5467.63,4024.26 5471.21,4021.21 5474.26,4017.63 5476.72,4013.62 5478.52,4009.27 5479.62,4004.69 5479.95,4000.5 5479.9,4000 5479.9,1050 5479.95,1049.5 5479.62,1045.31 5478.52,1040.73 5476.72,1036.38 5474.26,1032.37 5471.21,1028.79 5467.63,1025.74 5463.62,1023.28 5459.27,1021.48 5454.69,1020.38 5450.5,1020.05 5450,1020.1 4765.1,1020.1 4765.1,2740 4764.71,2741.95 4763.6,2743.61 4713.6,2793.6 4711.95,2794.71 4710,2795.1 1590,2795.1 1588.05,2794.71 1586.4,2793.6 1576.4,2783.6 1575.29,2781.95 1574.9,2780 1574.9,1020.1 1050,1020.1 1049.5,1020.05 1045.31,1020.38 1040.73,1021.48 1036.38,1023.28 1032.37,1025.74 1028.79,1028.79 1025.74,1032.37 1023.28,1036.38 1021.48,1040.73 1020.38,1045.31 1020.05,1049.5 1020.1,1050 1020.1,4000 1020.05,4000.5 1020.38,4004.69 1021.48,4009.27 1023.28,4013.62 1025.74,4017.63 1028.79,4021.21 1032.37,4024.26 1036.38,4026.72 1040.73,4028.52 1045.31,4029.62 1049.5,4029.95 1050,4029.9 5450,4029.9 5450.5,4029.95
3.3V on Power plane (split plane): 4754.9,2737.89 4754.9,1020.1 1585.1,1020.1 1585.1,2777.89 1592.11,2784.9 4707.89,2784.9

## Other copper
Power plane (plane layer: these items are gaps in the copper):
  lines w10: 1580,1000 1580,2780 1590,2790 4710,2790 4760,2740 4760,1000

## Silkscreen, mask and mechanical layers (free items; w line width, h text height)
Top Overlay:
  lines w10: 4730,2710 4790,2710 ; 4740,2660 4800,2660 4760,2700 4720,2660 4760,2660 4760,2600 ; 4760,2710 4760,2760
  text "Run" at 4150,1990 h60
  text "Prog." at 4170,1769.99 h60
  text "Jeremie Roy" at 1410,1346.66 h80
  text "RX" at 3220,1230 h60 r270
  text "TX" at 3330,1230 h60 r270
  text "GND" at 3430,1220 h60 r270
  text "Moteur" at 4110,1200 h60
  text "RST" at 2800,1090 h60
Board:
  the board outline again, w10

## Text inside footprints (layer, text, board x,y; h text height)
J1: Mechanical 13 "PCB EDGE" at 1047.9,2754.55 h32.02 r270